# EAGLE board OBI_SlaveBoard_final (EAGLE 7.1.0)
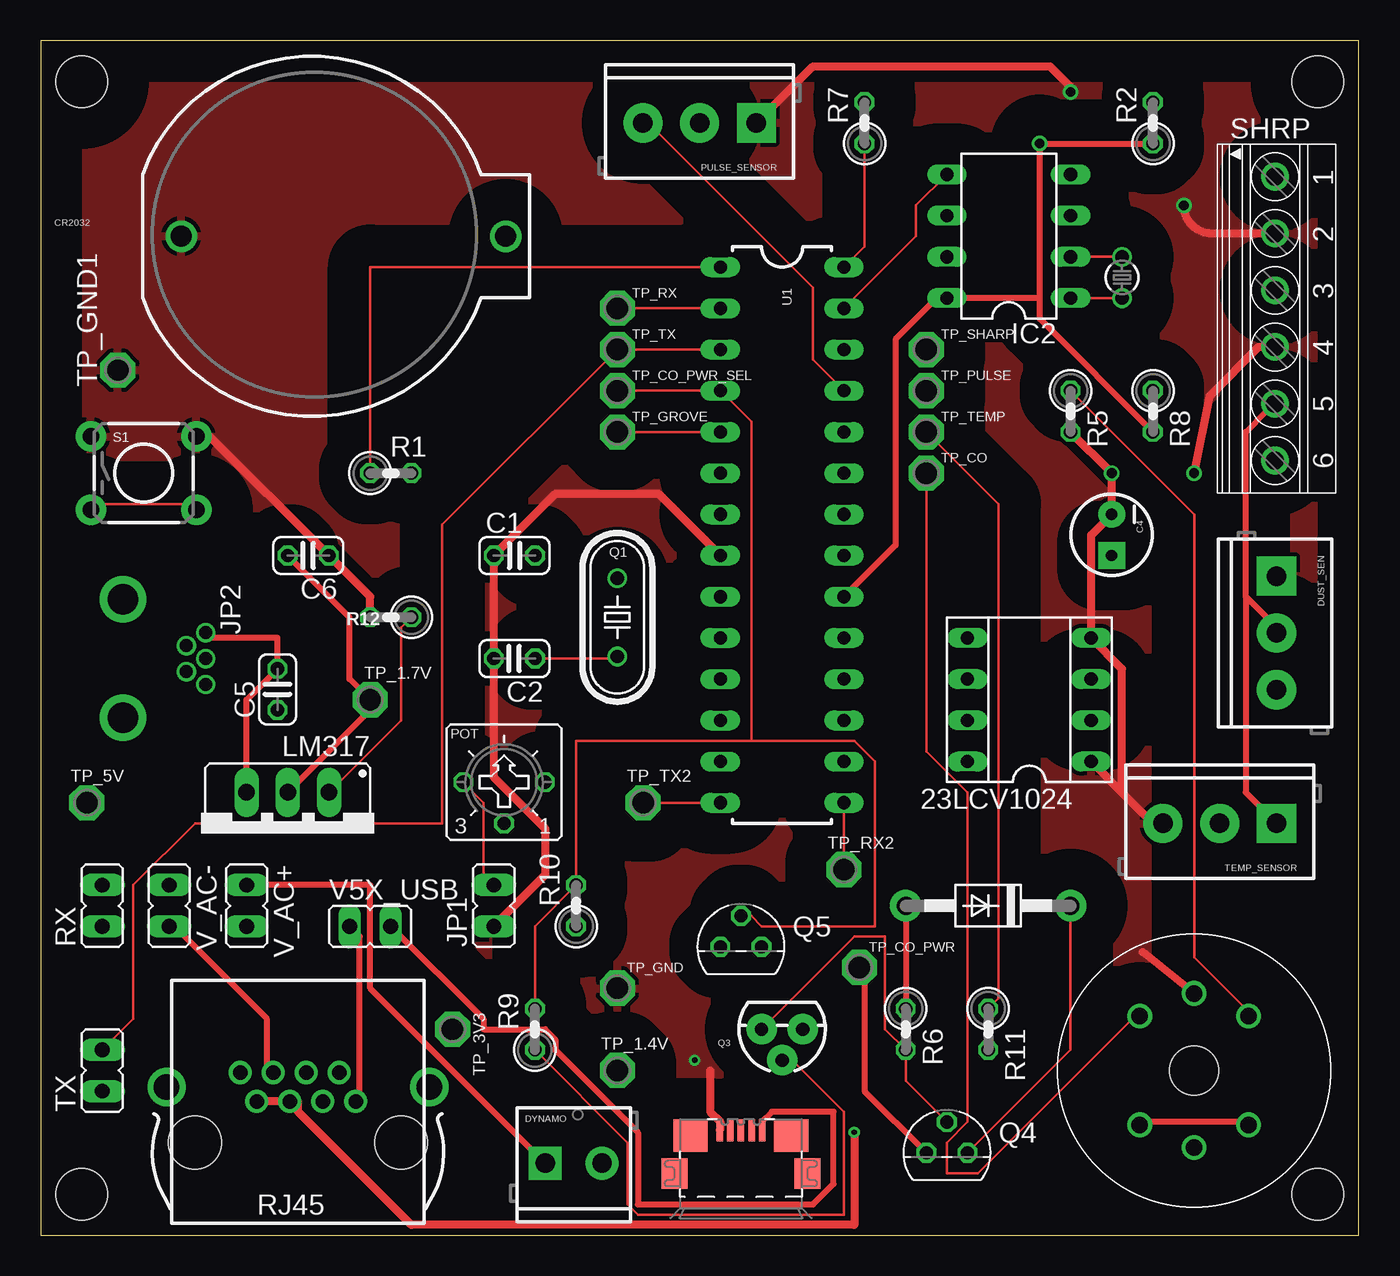
[diagram p0: board, top side]
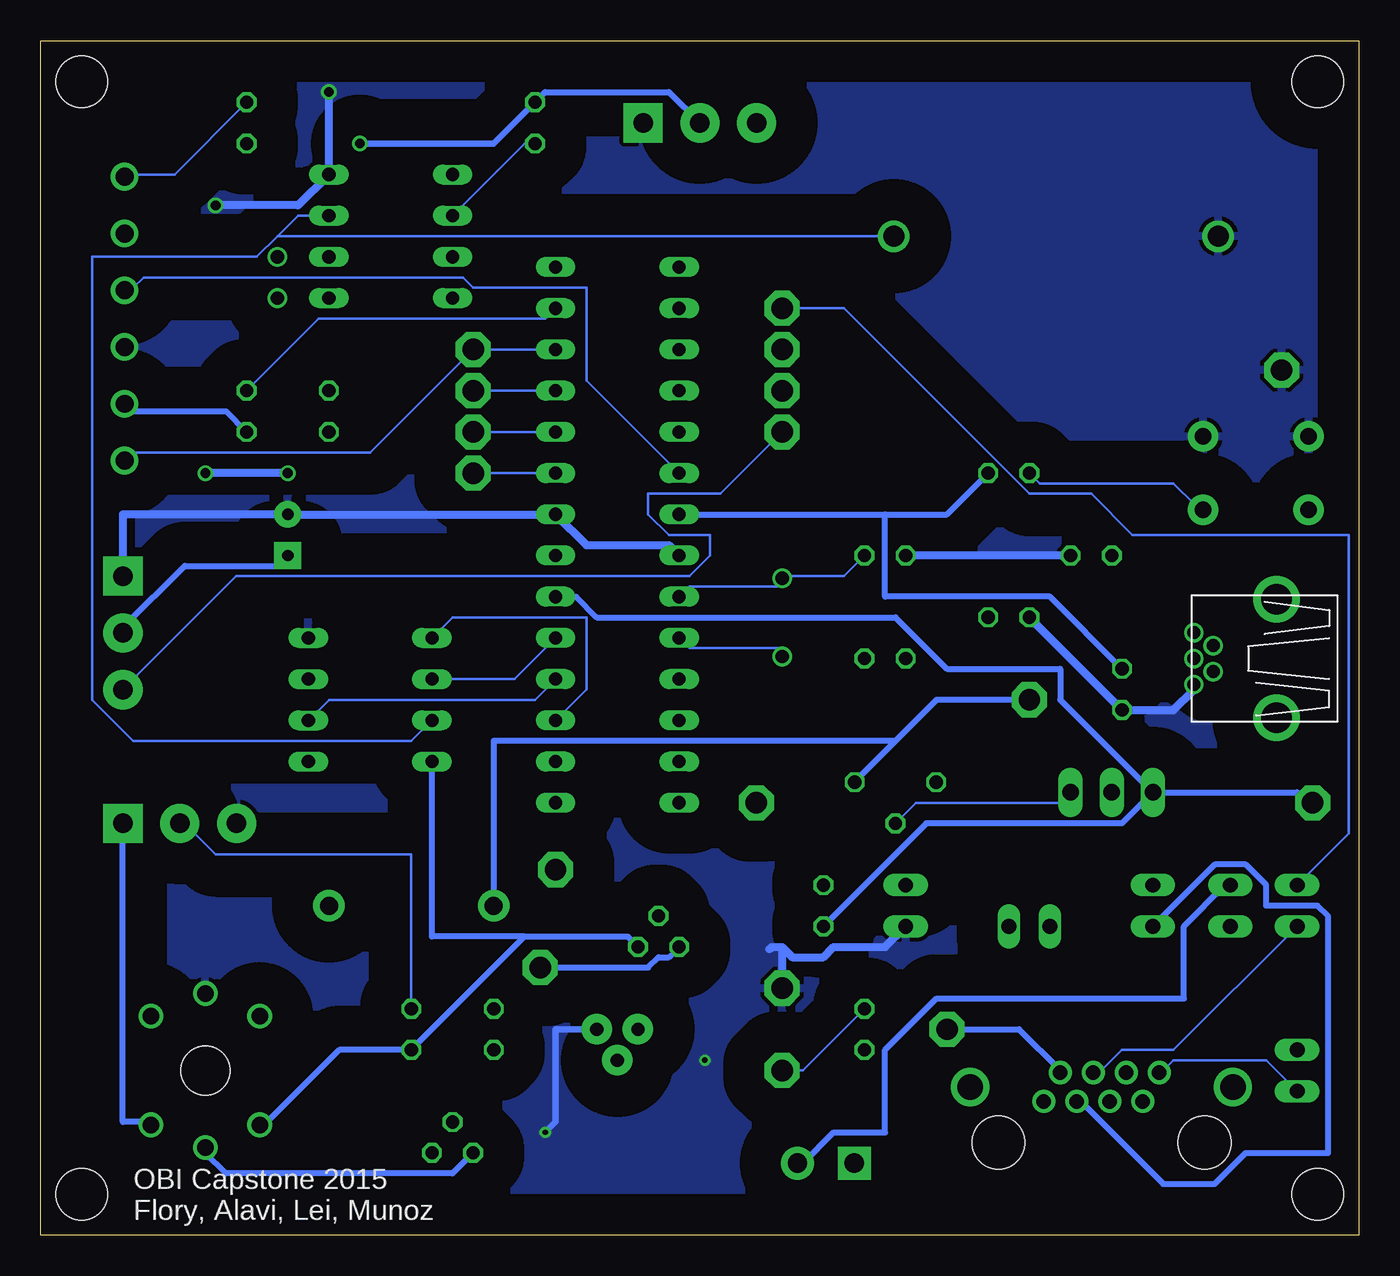
[diagram p1: board, bottom side, seen from below]

Size 81.28 x 73.66 mm. Coordinates in mm from the lower left corner, seen from the top.
Outline: 0,0 81.27,0 81.28,73.66 0,73.66 0,0
Copper layers (1*16): Top 0.0356mm / dielectric 1.5011mm / Bottom 0.0356mm
Design rules "OSH-Park-2-layer": minimum track width 6mil, minimum drill 13mil, track to track 6mil, track to pad 6mil, pad to pad 6mil, via to via 6mil, smd to smd 6mil, copper to edge 15mil, drill to drill 6mil, minimum pad ring 7mil, minimum via ring 7mil, stop-mask expansion 3mil, vias tented up to drill 0mil, thermal gap 10mil
Net classes: 1 Power: width 0.381 mm; 2 Ground: width 0.508 mm
Holes 3.17 mm at 2.54,2.54 78.74,2.54 78.74,71.12 2.54,71.12

## Footprints (pad centres in the part's own frame; a part is rotated, then mirrored left to right if it is on the bottom)
SOCKET-08 = drill 0.813 long: 1 -3.81,-3.81; 2 -1.27,-3.81; 3 1.27,-3.81; 4 3.81,-3.81; 5 3.81,3.81; 6 1.27,3.81; 7 -1.27,3.81; 8 -3.81,3.81
C025-024X044 = drill 0.813 octagon: 1 -1.27,0; 2 1.27,0
CPOL-RADIAL-10UF-25V = drill 0.7 pad 1.651 square: 1 1.27,0 | drill 0.7 pad 1.651: 2 -1.27,0
MQ-3 = drill 1.016: A1 -3.35,3.35; A2 -3.35,-3.35; B1 3.35,3.35; B2 3.35,-3.35; HA -4.75,0; HB 4.75,0 | hole 3: 0,0
BATTCOM_20MM_PTH = drill 1.3: 1 11.85,0; 2 -8.15,0
DO41-10 = drill 1.118 pad 1.93: A 5.08,0; C -5.08,0
SCREWTERMINAL-3.5MM-3 = drill 1.2 pad 2.413 square: 1 0,0 | drill 1.2 pad 2.413: 2 3.5,0; 3 7,0
SCREWTERMINAL-3.5MM-2 = drill 1.2 pad 2.032 square: 1 0,0 | drill 1.2 pad 2.032: 2 3.5,0
DIL08 = drill 0.813 long: 1 -3.81,-3.81; 2 -1.27,-3.81; 3 1.27,-3.81; 4 3.81,-3.81; 5 3.81,3.81; 6 1.27,3.81; 7 -1.27,3.81; 8 -3.81,3.81
JP1 = drill 0.914 long: 1 0,-1.27; 2 0,1.27
USB-MB-H = drill 0.8: D+ 5.1,0; D- 3.9,0.8; GND 5.1,-1.6; ID 3.9,-0.8; VBUS 5.1,1.6 | drill 1.9: P$6 0,-3.65; P$7 0,3.65
317TS = drill 1.016 long: 1 -2.54,-2.54; 2 0,-2.54; 3 2.54,-2.54
ZX62R-B-5P = smd 1.35 x 0.4: 1 2.675,-1.3; 2 2.675,-0.65; 3 2.675,0; 4 2.675,0.65; 5 2.675,1.3 | smd 1.9 x 1.6: M1 0,-4.1; M2 0,4.1 | smd 2 x 2.1: M3 2.35,3.1; M4 2.35,-3.1
CT6 = drill 0.813 octagon: A 2.515,0; E -2.515,0; S 0,-2.54
HC49/S = drill 0.813: 1 -2.413,0; 2 2.413,0
TO-92 = drill 0.813 pad 1.88: 1 -1.27,0; 2 0,1.905; 3 1.27,0
TO92 = drill 0.813 octagon: 1 1.27,0; 2 0,1.905; 3 -1.27,0
TC26V = drill 0.813: 1 -1.27,0; 2 1.27,0
0207/2V = drill 0.813 octagon: 1 -1.27,0; 2 1.27,0
0446200002 = drill 0.889 pad 1.422: 1 3.556,2.54; 2 2.54,4.318; 3 1.524,2.54; 4 0.508,4.318; 5 -0.508,2.54; 6 -1.524,4.318; 7 -2.54,2.54; 8 -3.556,4.318 | drill 1.575 pad 2.286: S@1 -8.103,3.429; S@2 8.103,3.429 | hole 3.251: 6.35,0; -6.35,0
TACTILE-PTH = drill 1.016 pad 1.88: 1 -3.251,2.261; 2 3.251,2.261; 3 -3.251,-2.261; 4 3.251,-2.261
1751280 = drill 1.1 pad 1.7: 1 -8.75,-0.1; 2 -5.25,-0.1; 3 -1.75,-0.1; 4 1.75,-0.1; 5 5.25,-0.1; 6 8.75,-0.1
P1-13 = drill 1.321 pad 2.159 octagon: TP 0,0
DIL28-3 = drill 0.813 long: 1 -16.51,-3.81; 2 -13.97,-3.81; 3 -11.43,-3.81; 4 -8.89,-3.81; 5 -6.35,-3.81; 6 -3.81,-3.81; 7 -1.27,-3.81; 8 1.27,-3.81; 9 3.81,-3.81; 10 6.35,-3.81; 11 8.89,-3.81; 12 11.43,-3.81; 13 13.97,-3.81; 14 16.51,-3.81; 15 16.51,3.81; 16 13.97,3.81; 17 11.43,3.81; 18 8.89,3.81; 19 6.35,3.81; 20 3.81,3.81; 21 1.27,3.81; 22 -1.27,3.81; 23 -3.81,3.81; 24 -6.35,3.81; 25 -8.89,3.81; 26 -11.43,3.81; 27 -13.97,3.81; 28 -16.51,3.81

## Placement (x,y rotation side)
23LCV1024  [SOCKET-08]  60.96,33.02 90 top
C1  22pF  [C025-024X044]  29.21,41.91 0 top
C2  22pF  [C025-024X044]  29.21,35.56 180 top
C4  220uF  [CPOL-RADIAL-10UF-25V]  66.04,43.18 270 top
C5  0.1uF  [C025-024X044]  14.61,33.66 90 top
C6  1uF  [C025-024X044]  16.51,41.91 180 top
CO2_SENSOR  METHANE_SENSOR  [MQ-3]  71.12,10.16 90 top
CR2032  [BATTCOM_20MM_PTH]  16.83,61.59 0 top
D4  1N5817-B  [DO41-10]  58.42,20.32 180 top
DUST_SEN  [SCREWTERMINAL-3.5MM-3]  76.2,40.64 270 top
DYNAMO  [SCREWTERMINAL-3.5MM-2]  31.11,4.45 0 top
IC2  DS1307  [DIL08]  59.69,61.59 90 top
JP1  [JP1]  27.94,20.32 0 top
JP2  USB-MB-H  [USB-MB-H]  5.08,35.56 0 top
LM317  [317TS]  15.24,24.77 180 top
MICROB  [ZX62R-B-5P]  43.18,3.81 90 top
POT  10k  [CT6]  28.57,27.94 0 top
PULSE_SENSOR  [SCREWTERMINAL-3.5MM-3]  44.13,68.58 180 top
Q1  [HC49/S]  35.56,38.1 90 top
Q3  2N3904  [TO-92]  45.72,12.7 180 top
Q4  [TO92]  55.88,5.08 0 top
Q5  [TO92]  43.18,17.78 0 top
Q6  32.768 kHz  [TC26V]  66.67,59.05 90 top
R1  10K  [0207/2V]  21.59,46.99 0 top
R2  150  [0207/2V]  68.58,68.58 90 top
R5  10K  [0207/2V]  63.5,50.8 270 top
R6  10k  [0207/2V]  53.34,12.7 270 top
R7  4.7k  [0207/2V]  50.8,68.58 90 top
R8  4.7k  [0207/2V]  68.58,50.8 270 top
R9  4.7k  [0207/2V]  30.48,12.7 90 top
R10  10k  [0207/2V]  33.02,20.32 90 top
R11  10K  [0207/2V]  58.42,12.7 270 top
R12  220  [0207/2V]  21.59,38.1 180 top
RJ45  [0446200002]  15.88,5.71 0 top
RX  [JP1]  3.81,20.32 0 top
S1  [TACTILE-PTH]  6.35,46.99 0 top
SHRP  [1751280]  76.2,56.52 270 top
TEMP_SENSOR  [SCREWTERMINAL-3.5MM-3]  76.2,25.4 180 top
TP_1.4V  TPPAD1-13  [P1-13]  35.56,10.16 0 top
TP_1.7V  TPPAD1-13  [P1-13]  20.32,33.02 0 top
TP_3V3  TPPAD1-13  [P1-13]  25.4,12.7 270 top
TP_5V  TPPAD1-13  [P1-13]  2.86,26.67 0 top
TP_CO  TPPAD1-13  [P1-13]  54.61,46.99 0 top
TP_CO_PWR  TPPAD1-13  [P1-13]  50.48,16.51 0 top
TP_CO_PWR_SEL  TPPAD1-13  [P1-13]  35.56,52.07 0 top
TP_GND  TPPAD1-13  [P1-13]  35.56,15.24 0 top
TP_GND1  TPPAD1-13  [P1-13]  4.76,53.34 90 top
TP_GROVE  TPPAD1-13  [P1-13]  35.56,49.53 0 top
TP_PULSE  TPPAD1-13  [P1-13]  54.61,52.07 0 top
TP_RX  TPPAD1-13  [P1-13]  35.56,57.15 0 top
TP_RX2  TPPAD1-13  [P1-13]  49.53,22.54 0 top
TP_SHARP  TPPAD1-13  [P1-13]  54.61,54.61 0 top
TP_TEMP  TPPAD1-13  [P1-13]  54.61,49.53 0 top
TP_TX  TPPAD1-13  [P1-13]  35.56,54.61 0 top
TP_TX2  TPPAD1-13  [P1-13]  37.15,26.67 0 top
TX  [JP1]  3.81,10.16 0 top
U1  ATMEGA328P_PDIP  [DIL28-3]  45.72,43.18 270 top
V5X_USB  [JP1]  20.32,19.05 270 top
V_AC+  [JP1]  12.7,20.32 180 top
V_AC-  [JP1]  7.94,20.32 180 top

## Library data of the parts
23LCV1024 = ic-package
C1 C2 C5 C6 R1 R2 R5-R12 = rcl
C4 = SparkFun-Capacitors
CO2_SENSOR = SparkFun-Sensors
CR2032 = SparkFun-Electromechanical
D4 IC2 = adafruit
DUST_SEN JP2 PULSE_SENSOR TEMP_SENSOR = SparkFun-Connectors
DYNAMO = SparkFun-Connectors; PROD_ID: CONN-08399
JP1 RX TX V5X_USB V_AC+ V_AC- = jumper
LM317 = v-reg
MICROB = con-hirose
POT = pot
Q1 = crystal; OC_FARNELL: 1667008; OC_NEWARK: unknown
Q3 = SparkFun-DiscreteSemi; PROD_ID: TRANS-08447
Q4 Q5 = transistor-fet
Q6 = crystal; OC_FARNELL: unknown; OC_NEWARK: unknown
RJ45 = con-molex; MF: MOLEX; MPN: 0446200002; OC_FARNELL: 9251910
S1 = SparkFun-Retired
SHRP = con-phoenix-350; MPN: 1751280; OC_FARNELL: unknown; OC_NEWARK: 27R1765
TP_1.4V TP_1.7V TP_3V3 TP_5V TP_CO TP_CO_PWR TP_CO_PWR_SEL TP_GND TP_GND1 TP_GROVE TP_PULSE TP_RX TP_RX2 TP_SHARP TP_TEMP TP_TX TP_TX2 = testpad
U1 = SparkFun-DigitalIC

## Nets
1.7V [Power]: C6.2 D4.A LM317.2 POT.A R6.1 TP_1.7V.TP
3.3V [Power]: RJ45.2 TP_3V3.TP
5V [Power]: 23LCV1024.8 C4.1 C5.2 CO2_SENSOR.A1 CO2_SENSOR.A2 DUST_SEN.2 IC2.8 JP2.VBUS LM317.3 PULSE_SENSOR.2 Q5.1 R1.2 R2.1 R7.2 R8.2 R10.1 R11.2 SHRP.5 TEMP_SENSOR.1 TP_5V.TP U1.7 U1.20
CO: CO2_SENSOR.B1 TP_CO.TP U1.23
CO_PWR [Power]: CO2_SENSOR.HA Q4.3 Q5.3 TP_CO_PWR.TP
CO_PWR_SEL: Q5.2 R9.2 R10.2 TP_1.4V.TP TP_CO_PWR_SEL.TP U1.4
GND [Ground]: 23LCV1024.1 23LCV1024.4 C1.1 C2.2 C4.2 C5.1 C6.1 CO2_SENSOR.HB CR2032.2 DUST_SEN.1 IC2.4 JP1.1 JP2.GND MICROB.5 PULSE_SENSOR.1 Q3.1 R5.2 R12.2 RJ45.5 RJ45.7 S1.1 S1.2 SHRP.2 SHRP.4 TEMP_SENSOR.3 TP_GND1.TP TP_GND.TP U1.8 U1.22
GROVE: DUST_SEN.3 TP_GROVE.TP U1.5
MISO: 23LCV1024.2 U1.18
MOSI: 23LCV1024.5 U1.17
N$1: IC2.1 Q6.1
N$2: Q3.3 Q4.2 R6.2
N$3: C1.2 Q1.2 U1.9
N$4: Q3.2 R9.1
N$5: C2.1 Q1.1 U1.10
N$6: IC2.2 Q6.2
N$7: RJ45.4 RX.1
N$8: R2.2 SHRP.1
N$9: LM317.1 POT.S R12.1
N$10: RJ45.8 TX.1
N$11 [Power]: DYNAMO.1 V_AC+.1
N$12 [Power]: MICROB.1 V5X_USB.2
N$13: JP1.2 POT.E
N$14 [Power]: DYNAMO.2 V_AC-.1
N$15: D4.C Q4.1
N$17: CO2_SENSOR.B2 R5.1
PULSE: PULSE_SENSOR.3 TP_PULSE.TP U1.25
RESET: R1.1 S1.3 S1.4 U1.1
RX: RX.2 TP_RX.TP U1.2
RX2: TP_RX2.TP U1.15
SCK: 23LCV1024.6 U1.19
SCL: IC2.6 R7.1 U1.28
SDA: IC2.5 R8.1 U1.27
SHARP: SHRP.6 TP_SHARP.TP U1.26
SHARP_LED: SHRP.3 U1.6
TEMP: R11.1 TEMP_SENSOR.2 TP_TEMP.TP U1.24
TX: TP_TX.TP TX.2 U1.3
TX2: TP_TX2.TP U1.14
V5X_USB [Power]: RJ45.1 V5X_USB.1
V_AC+ [Power]: RJ45.3 V_AC+.2
V_AC- [Power]: RJ45.6 V_AC-.2
V_BAT: 23LCV1024.7 CR2032.1 IC2.3

## Tracks (layer width: path | path; a pad name or v marks a point on that pad's centre or on a via)
1.7V
  Top 0.381: D4.A R6.1 | C6.2 19.05,38.1 19.05,34.29 TP_1.7V.TP 20.32,32.38 LM317.2
  Bottom 0.381: 28.57,30.48 26.04,33.02 TP_1.7V.TP | 28.57,30.48 31.11,27.94 POT.A | D4.A 53.34,30.48 28.57,30.48
3.3V
  Bottom 0.381: TP_3V3.TP 20.95,12.7 18.41,10.16 RJ45.2
5V  (via drill 0.6)
  Top 0.381: JP2.VBUS 10.16,36.83 14.61,36.83 C5.2 12.7,33.02 LM317.3 | CO2_SENSOR.A1 67.94,6.99 74.3,6.99 CO2_SENSOR.A2 | U1.20 52.7,42.55 52.7,55.24 55.24,57.78 IC2.8 61.59,57.78 | 74.3,39.37 74.3,49.53 75.56,50.8 SHRP.5 | 74.3,39.37 76.2,37.47 DUST_SEN.2 | 61.59,57.78 61.59,56.52 R8.2 | R2.1 v61.59,67.31 61.59,57.78 | TEMP_SENSOR.1 74.3,27.3 74.3,39.37
  Bottom 0.381: R1.2 25.4,44.45 29.21,44.45 | U1.7 29.21,44.45 | R10.1 26.67,25.4 14.61,25.4 LM317.3 | LM317.3 3.81,27.3 3.17,26.67 TP_5V.TP | 29.21,44.45 29.21,39.37 19.05,39.37 C5.2 | TEMP_SENSOR.1 76.2,6.99 74.93,6.99 CO2_SENSOR.A2 | Q5.1 45.09,18.41 51.44,18.41 | 51.44,18.41 R11.2 62.87,11.43 67.31,6.99 CO2_SENSOR.A1 | 23LCV1024.8 57.15,18.41 51.44,18.41 | 53.34,67.31 R7.2 50.16,70.48 42.55,70.48 PULSE_SENSOR.2 | R8.2 69.85,50.8 75.56,50.8 SHRP.5 | C4.1 66.67,41.27 72.39,41.27 76.2,37.47 DUST_SEN.2 | LM317.3 18.41,33.02 18.41,34.92 25.4,34.92 28.57,38.1 46.99,38.1 48.26,39.37 U1.20
  Bottom 0.406: 53.34,67.31 v61.59,67.31
CO
  Top 0.152: TP_CO.TP 54.61,29.84 57.15,27.3 57.15,6.99 55.88,5.71 55.88,3.81 57.78,3.81 67.31,13.34 CO2_SENSOR.B1
  Bottom 0.152: TP_CO.TP U1.23
CO_PWR
  Top 0.381: Q4.3 50.8,8.89 50.8,16.51 TP_CO_PWR.TP
  Bottom 0.381: Q5.3 42.55,17.14 43.18,17.14 43.81,16.51 TP_CO_PWR.TP | Q4.3 55.88,3.81 69.85,3.81 71.12,5.08 CO2_SENSOR.HA
CO_PWR_SEL
  Top 0.152: TP_CO_PWR_SEL.TP U1.4 43.81,50.16 43.81,30.48 | R9.2 30.48,19.05 R10.2 33.02,30.48 43.81,30.48 | Q5.2 43.81,19.68 44.45,19.05 51.44,19.05 51.44,29.21 50.16,30.48 43.81,30.48
  Bottom 0.152: R9.2 34.29,10.16 TP_1.4V.TP
GND  (via drill 0.33, 0.6)
  Top 0.508: R12.2 20.32,39.37 C6.1 10.16,49.53 S1.2 | R5.2 v66.04,46.99 C4.2 64.77,43.18 23LCV1024.4 66.67,34.92 66.67,27.3 | RJ45.7 RJ45.5 15.88,8.26 15.88,7.62 22.86,0.64 50.16,0.64 v50.16,6.35 | 41.27,10.16 41.27,7.62 41.91,6.99 MICROB.5 | 66.67,27.3 68.58,25.4 TEMP_SENSOR.3 | 66.67,27.3 23LCV1024.1 | v71.12,46.99 72.07,51.75 75.08,54.77 SHRP.4 | PULSE_SENSOR.1 47.62,72.07 62.23,72.07 63.5,70.8 v63.5,70.48 | U1.8 38.1,45.72 31.75,45.72 C1.1 C2.2 27.94,28.26 31.11,25.08 31.11,22.23 JP1.1 | CO2_SENSOR.HB 67.94,17.46 | SHRP.2 72.22,61.77 arc-90 v70.48,63.5
  Bottom 0.406: Q3.1 49.53,12.7 49.53,6.99 v50.16,6.35
  Bottom 0.508: JP2.GND 10.16,33.66 11.43,32.38 C5.1 R12.2 | C6.1 C1.1 | U1.8 42.55,42.55 47.62,42.55 U1.22 C4.2 76.2,44.45 DUST_SEN.1 | JP1.1 29.21,17.78 32.38,17.78 33.02,17.14 34.92,17.14 35.56,17.78 | 35.56,17.78 36.2,17.78 36.34,17.63 | v66.04,46.99 v71.12,46.99 | v63.5,70.48 IC2.4 65.41,63.5 v70.48,63.5 | 35.56,17.78 TP_GND.TP
  other vias: 40.32,10.79
  pour Top (isolate 2.54): 0,0 0,73.66 81.28,73.66 81.28,0
  pour Bottom (isolate 2.54): 81.28,73.66 81.28,0 0,0 0,73.66
GROVE
  Top 0.152: TP_GROVE.TP U1.5
  Bottom 0.152: TP_GROVE.TP 39.37,45.72 43.81,45.72 43.81,44.45 42.55,43.18 40.01,43.18 40.01,41.91 41.27,40.64 69.22,40.64 76.2,33.66 DUST_SEN.3
MISO
  Bottom 0.152: U1.18 50.8,33.02 63.5,33.02 23LCV1024.2
MOSI
  Bottom 0.152: U1.17 47.62,33.66 47.62,38.1 55.88,38.1 23LCV1024.5
N$1
  Top 0.152: Q6.1 IC2.1
N$2
  Top 0.152: Q4.2 53.34,9.53 R6.2 52.07,12.7 52.07,18.41 50.16,18.41 Q3.3
N$3
  Bottom 0.152: C1.2 31.75,40.64 35.56,40.64 Q1.2 35.56,40.01 41.27,40.01 U1.9
N$4
  Top 0.152: R9.1 36.2,5.71 36.2,1.91 36.83,1.27 49.53,1.27 49.53,7.62 46.35,10.79 Q3.2
N$5
  Top 0.152: C2.1 35.56,35.56 Q1.1
  Bottom 0.152: U1.10 41.27,36.2 35.56,36.2 Q1.1
N$6
  Top 0.152: Q6.2 IC2.2
N$7
  Bottom 0.152: RX.1 11.43,11.43 14.61,11.43 15.88,10.16 RJ45.4
N$8
  Bottom 0.152: R2.2 73.03,65.41 75.56,65.41 SHRP.1
N$9
  Top 0.152: R12.1 22.23,37.47 22.23,31.75 LM317.1
  Bottom 0.152: POT.S 27.3,26.67 18.41,26.67 LM317.1
N$10
  Bottom 0.152: TX.1 5.71,10.79 11.43,10.79 12.06,10.16 RJ45.8
N$11
  Top 0.381: V_AC+.1 20.32,21.59 20.32,15.24 DYNAMO.1
N$12
  Top 0.381: V5X_USB.2 27.3,13.34 27.3,12.7 31.11,12.7 31.75,12.06 31.75,11.43 36.83,6.35 36.83,1.91 47.62,1.91 48.9,3.17 48.9,7.62 45.09,7.62 44.45,6.99 MICROB.1
N$13
  Top 0.152: JP1.2 27.3,22.23 27.3,26.67 26.04,27.94 POT.E
N$14
  Bottom 0.381: V_AC-.1 8.26,21.59 10.79,19.05 10.79,14.61 26.04,14.61 29.21,11.43 29.21,6.35 32.38,6.35 34.29,4.45 DYNAMO.2
N$15
  Top 0.152: Q4.1 63.5,11.43 D4.C
N$17
  Top 0.152: R5.1 71.12,44.45 71.12,17.14 74.3,13.97 CO2_SENSOR.B2
PULSE
  Top 0.152: U1.25 47.62,53.98 47.62,58.42 37.47,68.58 PULSE_SENSOR.3
  Bottom 0.152: TP_PULSE.TP U1.25
RESET
  Top 0.152: U1.1 20.32,59.69 R1.1 | S1.3 3.17,45.09 9.53,45.09 S1.4
  Bottom 0.152: R1.1 19.68,46.35 11.43,46.35 10.16,45.09 S1.4
RX
  Top 0.152: TP_RX.TP U1.2
  Bottom 0.152: RX.2 0.64,24.77 0.64,43.18 13.97,43.18 16.51,45.72 20.32,45.72 31.75,57.15 TP_RX.TP
RX2
  Top 0.152: TP_RX2.TP U1.15
SCK
  Bottom 0.152: U1.19 52.07,34.29 23LCV1024.6
SCL
  Top 0.152: U1.28 50.8,60.96 R7.1
  Bottom 0.152: IC2.6 51.44,67.31 R7.1
SDA
  Top 0.152: U1.27 53.98,61.59 53.98,63.5 IC2.5
  Bottom 0.152: R8.1 64.14,56.52 50.16,56.52 U1.27
SHARP
  Bottom 0.152: U1.26 TP_SHARP.TP 60.96,48.26 75.56,48.26 SHRP.6
SHARP_LED
  Bottom 0.152: U1.6 47.62,52.7 47.62,58.42 54.61,58.42 55.24,59.05 74.93,59.05 75.56,58.42 SHRP.3
TEMP
  Top 0.152: TP_TEMP.TP 59.05,45.09 59.05,14.61 R11.1
  Bottom 0.152: TP_TEMP.TP U1.24 | R11.1 58.42,23.5 70.48,23.5 72.39,25.4 TEMP_SENSOR.2
TX
  Top 0.152: U1.3 TP_TX.TP 24.77,43.81 24.77,25.4 9.53,25.4 5.71,21.59 5.71,13.34 TX.2
TX2
  Top 0.152: TP_TX2.TP U1.14
V5X_USB
  Top 0.381: V5X_USB.1 19.68,18.41 19.68,8.26 RJ45.1
V_AC+
  Bottom 0.381: V_AC+.2 8.89,22.86 6.99,22.86 5.71,21.59 5.71,20.32 2.54,20.32 1.91,19.68 1.91,5.08 6.99,5.08 8.89,3.17 12.06,3.17 17.14,8.26 RJ45.3
V_AC-
  Top 0.381: V_AC-.2 8.26,19.05 13.97,13.34 13.97,10.16 RJ45.6
V_BAT
  Bottom 0.152: 23LCV1024.7 58.42,30.48 75.56,30.48 78.11,33.02 78.11,60.33 67.94,60.33 66.67,61.59 | 66.67,61.59 65.41,62.87 IC2.3 | 66.67,61.59 30.48,61.59 CR2032.1

## Text on the board
bNames: OBI Capstone 2015 / Flory, Alavi, Lei, Munoz